# Altium PCB polygon-nognd.PcbDoc
Units mil, origin at the board's own origin, x right, y up, seen from the top; angles counter-clockwise.
Board outline 5872.3 x 3866.25 mil, 2 copper layers (Top Layer, Bottom Layer); 46 components, 102 nets, 353 pads, 252 vias.
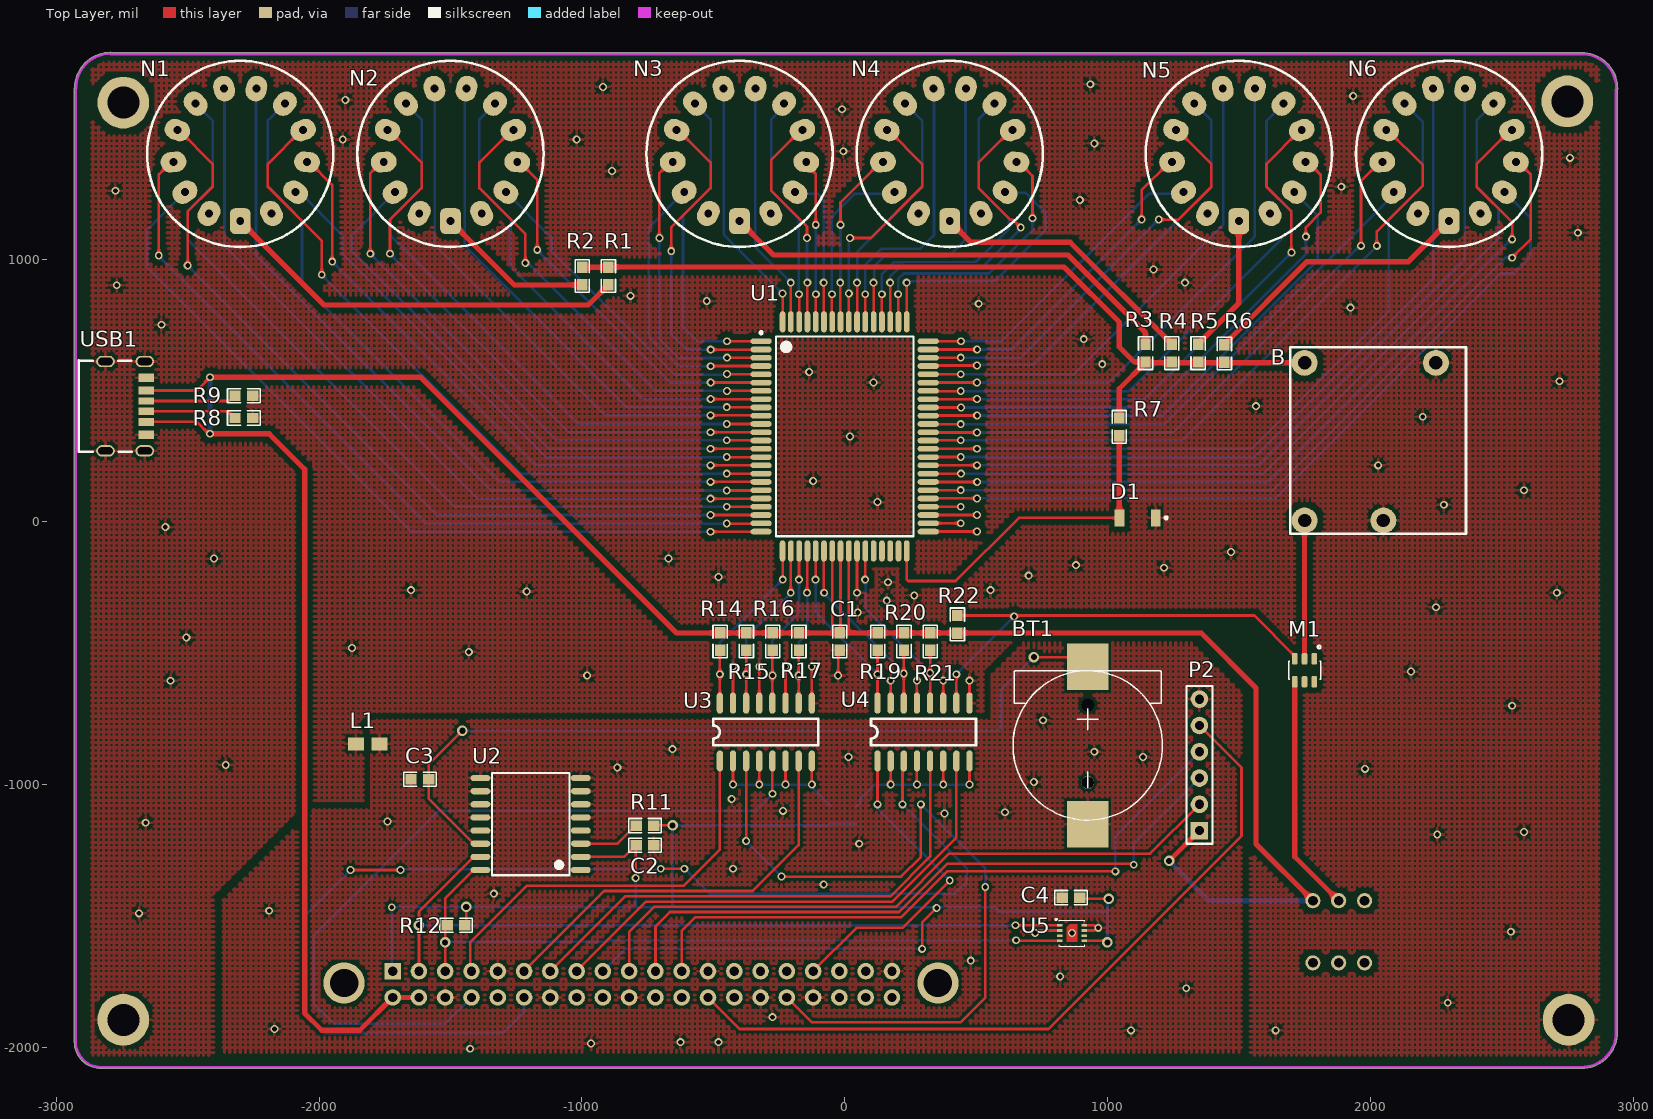
[diagram p0: Top Layer view]
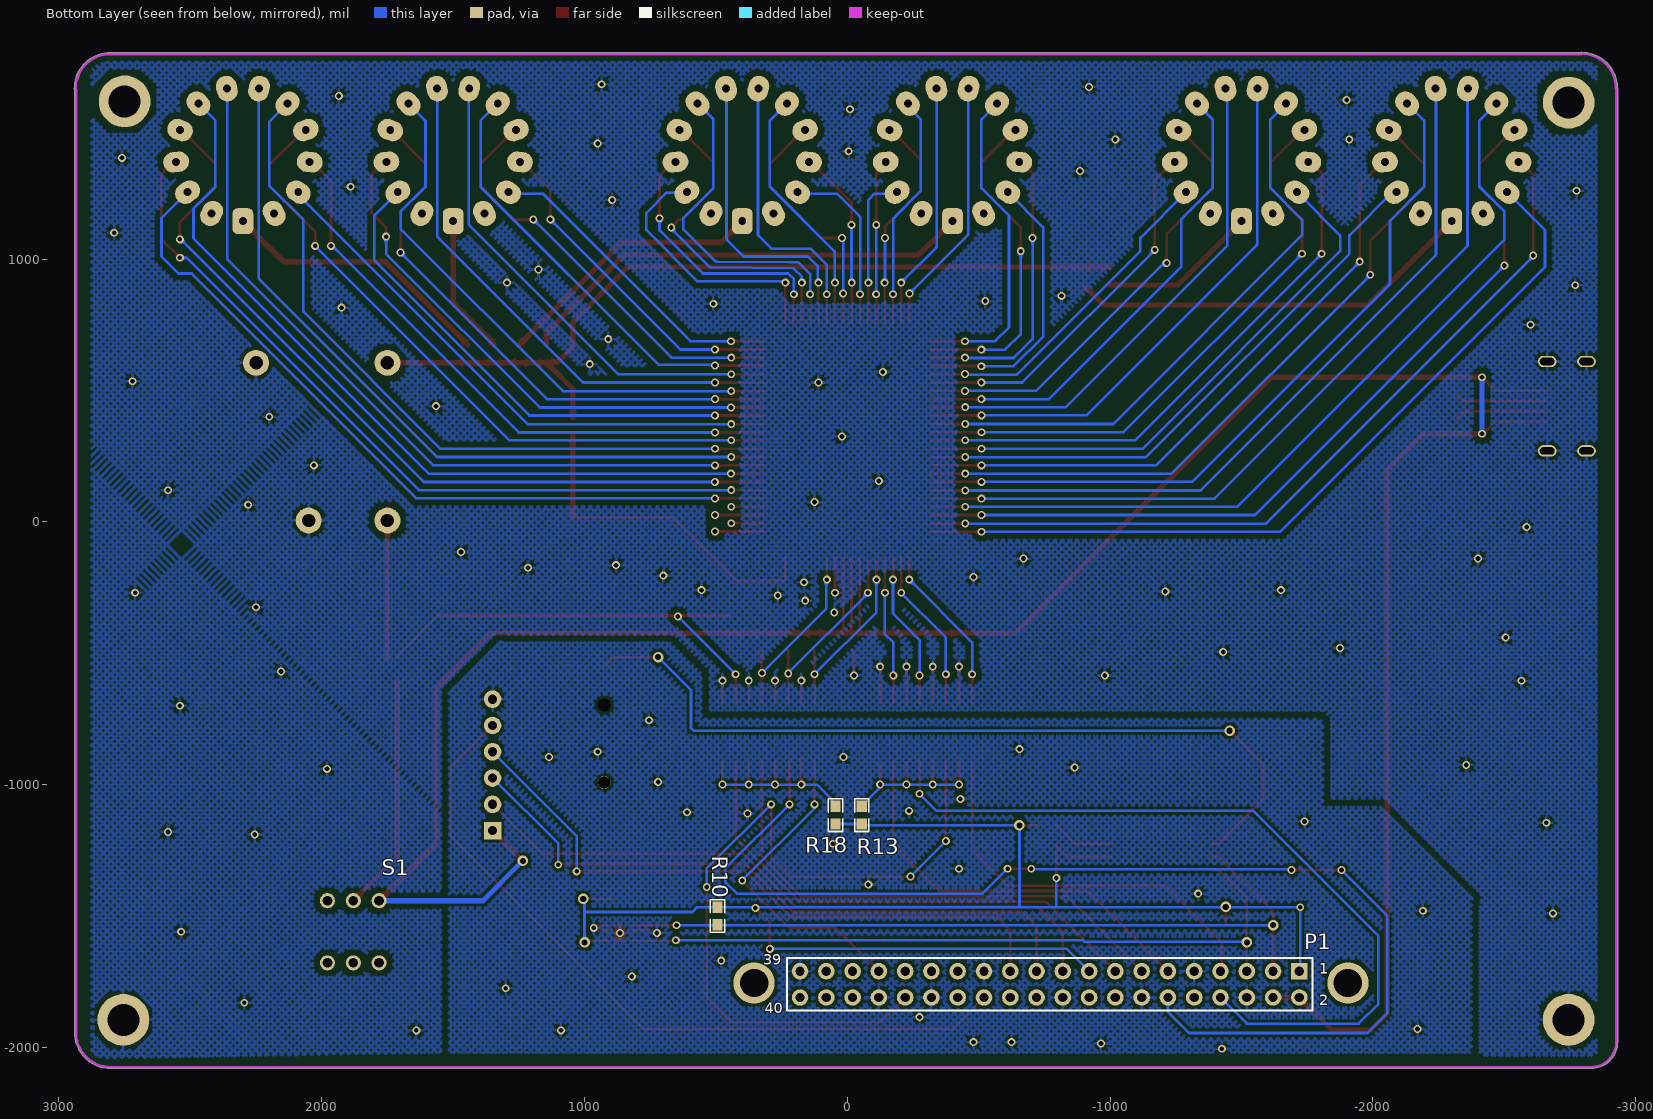
[diagram p1: Bottom Layer view, seen from below]

## Layer stack, top to bottom
Top Solder: solder mask 0.4, Solder Resist, Dk 3.5
Top Layer: signal copper 1.4
Dielectric 1: dielectric 12.6, FR-4, Dk 4.8
Bottom Layer: signal copper 1.4
Bottom Solder: solder mask 0.4, Solder Resist, Dk 3.5

## Board outline
-2931.06,-1980.07 ccw(c-2830.5,-1979.45) -2831.03,-2080.01 ccw(c-2831,-2075) -2831,-2080.01 2800,-2080.01 ccw(c2800,-2075) 2802.52,-2079.34 ccw(c2805.03,-2075) 2805.07,-2080.01 ccw(c2804,-1943.78) 2940.24,-1943.78 ccw(c2804,-1943.78) 2940.1,-1937.76 ccw(c2935.09,-1937.98) 2940.02,-1937.02 2940.02,1645 ccw(c2935,1645) 2939.99,1645.47 ccw(c2936.22,1648.78) 2941.24,1648.78 ccw(c2805,1648.78) 2805,1785.02 ccw(c2805,1780) 2802.5,1784.35 ccw(c2800,1780) 2800,1785.02 -2791.79,1785.02 ccw(c-2795.06,1781.22) -2795.11,1786.23 ccw(c-2793.78,1650) -2930,1652.04 ccw(c-2926.05,1648.95) -2931.06,1648.95 -2931.06,-1980.04 ccw(c-2926.05,-1980.04)

## Design rules (kind name [scope] priority, off if disabled: settings)
Clearance Clearance_2 [All] p1: gap=9.5 ignorepadtopadclearanceinfootprint=FALSE
Clearance Clearance_1 [All] p2: gap=10 ignorepadtopadclearanceinfootprint=FALSE except(0: Arc-Hole Track-Hole SMDPad-Hole THPad-Hole Via-Hole Fill-Hole Poly-Hole Region-Hole Text-Hole)
Clearance [All] p3: gap=10 ignorepadtopadclearanceinfootprint=FALSE except(0: Arc-Hole Track-Hole SMDPad-Hole THPad-Hole Via-Hole Fill-Hole Poly-Hole Region-Hole Text-Hole)
PolygonConnect [All] p1: connectstyle=Relief reliefconductorwidth=10 reliefentries=4 polygonreliefangle="90 Angle" airgapwidth=10
RoutingVias [All] p1: holewidth=28 width=50 viastyle="Through Hole" minholewidth=10 minwidth=20 maxholewidth=28 maxwidth=50
SolderMaskExpansion [All] p1: expansion=4 istentingtop=FALSE
Width [All] p1: maxlimit=20 minlimit=1 preferedwidth=10 minimp=50.000000 maximp=50.000000 favimp=50.000000
30 further rules are at their usual default settings.

## Components (designator, comment, footprint, x,y, rotation, side; value= is the part's Value field where it differs from the comment)
B "NCH8200HV" NCH8200HV 1750,5 r90 top
BT1 "CR1220 holder" BAT1220 925,-850 r180 top
C1 "Cap" C0603 -20,-455 r90 top value=100pF
C2 "Cap Semi" C0603 -760,-1230 r0 top value=104
C3 "Cap Semi" C0603 -1616.54,-979 r0 top value=104
C4 "Cap" C0603 861.54,-1429 r0 top value=100nF
D1 "ZM75" LL-34 1115,15 r180 top
L1 "L0" 0805 -1770,-845 r180 top
M1 "PMOS-AO6401A" SOT95P250X110-6N 1750,-565 r270 top
N1 "ИН-14" IN14 -2300,1400 r0 top
N2 "ИН-14" IN14 -1500,1400 r0 top
N3 "ИН-14" IN14 -400,1400 r0 top
N4 "ИН-14" IN14 400,1400 r0 top
N5 "ИН-14" IN14 1500,1400 r0 top
N6 "ИН-14" IN14 2300,1400 r0 top
P1 "Rasp GPIO" HDR2.54-LI-2x20P -770,-1760 r0 bottom
P2 "Header 6" HDR2.54-LI-6P 1350,-925 r90 top
R1 "Res Semi" R0603 -900,935 r90 top value=20K
R2 "Res Semi" R0603 -1000,935 r90 top value=20K
R3 "Res Semi" R0603 1146,641.54 r270 top value=20K
R4 "Res Semi" R0603 1246,641.54 r270 top value=20K
R5 "Res Semi" R0603 1346,641.54 r270 top value=20K
R6 "Res Semi" R0603 1446,640 r270 top value=20K
R7 "Res Semi" R0603 1044,361.54 r90 top value=240K
R8 "Res Semi" R0603 -2286.54,396 r0 top value=5.1K
R9 "Res Semi" R0603 -2286.54,481 r0 top value=5.1K
R10 "Res Semi" R0603 495,-1500 r90 bottom value=4.7K
R11 "Res Semi" R0603 -760,-1155 r0 top value=10K
R12 "Res Semi" R0603 -1478.46,-1534 r0 top value=4.7K
R13 "Res Semi" R0603 -56,-1116.54 r270 bottom value=150
R14 "Res Semi" R0603 -475,-455 r90 top value=1.9K
R15 "Res Semi" R0603 -375,-455 r90 top value=1.9K
R16 "Res Semi" R0603 -275,-455 r90 top value=1.9K
R17 "Res Semi" R0603 -175,-455 r90 top value=1.9K
R18 "Res Semi" R0603 44,-1116.54 r270 bottom value=150
R19 "Res Semi" R0603 125,-455 r90 top value=1.9K
R20 "Res Semi" R0603 225,-455 r90 top value=1.9K
R21 "Res Semi" R0603 325,-455 r90 top value=1.9K
R22 "Res Semi" R0603 430,-390 r270 top value=1.9K
S1 "XKB8080-Z" SW_PVA2EEH21.7NV2 1880,-1560 r180 bottom
U1 "HV57708" HV57708PG 0,325 r0 top
U2 "DS3231" SOP16_75MM -1195,-1150 r180 top
U3 "TLP290-4" SO16 -300,-800 r90 top
U4 "TLP290-4" SO16 300,-800 r90 top
U5 "SHT31" SHT3x-x-P 865,-1565 r0 top
USB1 "USB3-TypeC-6p" USB-TYPE-C-SMD6 -2735,440 r0 top

## Footprints (in the part's own frame and the unit in brackets; to place one, negate y for a bottom-side part, rotate by r counter-clockwise, add the part's x,y. Pads: shape width x height; smd on the part's side, far side on the other; paste and mask are expansions set on the pad)
0805 [mil] "1/8W"
  rect 60x50 smd: 1(0,0) 2(90,0)
BAT1220 [mm]
  round 1.2 hole 1.2 unplated: 0(0,3.607)
  round 1.2 hole 1.3 unplated: 0(0,-3.886)
  rect 4x4.5 smd: 1(0,-7.595) 2(0,7.645)
  silkscreen extent -7.22,-7.19 7.22,7.24
C0603 [mm] "Chip Resistor; Body 1.6 x 0.8 mm (LxW typ)"
  rect 1.1x1 smd: 1(-0.85,-0.025) 2(0.85,-0.025)
  silkscreen extent -1.57,-0.71 1.57,0.66
HDR2.54-LI-2x20P [mm] "双排排针，20x2脚"
  rect 1.6x1.6 hole 0.9: 1(-24.13,-1.27)
  round 1.6 hole 0.9: 2(-24.13,1.27) 3(-21.59,-1.27) 4(-21.59,1.27) 5(-19.05,-1.27) 6(-19.05,1.27) 7(-16.51,-1.27) 8(-16.51,1.27) 9(-13.97,-1.27) 10(-13.97,1.27) 11(-11.43,-1.27) 12(-11.43,1.27) 13(-8.89,-1.27) 14(-8.89,1.27) 15(-6.35,-1.27) 16(-6.35,1.27) 17(-3.81,-1.27) 18(-3.81,1.27) 19(-1.27,-1.27) 20(-1.27,1.27) 21(1.27,-1.27) 22(1.27,1.27) 23(3.81,-1.27) 24(3.81,1.27) 25(6.35,-1.27) 26(6.35,1.27) 27(8.89,-1.27) 28(8.89,1.27) 29(11.43,-1.27) 30(11.43,1.27) 31(13.97,-1.27) 32(13.97,1.27) 33(16.51,-1.27) 34(16.51,1.27) 35(19.05,-1.27) 36(19.05,1.27) 37(21.59,-1.27) 38(21.59,1.27) 39(24.13,-1.27) 40(24.13,1.27)
  silkscreen extent -25.4,-2.54 25.4,2.54, body extent -25.4,-2.54 25.4,2.54, height 8.5
HDR2.54-LI-6P [mm] "排针，6脚"
  rect 1.7x1.7 hole 0.9: 1(-6.35,0)
  round 1.7 hole 0.9: 2(-3.81,0) 3(-1.27,0) 4(1.27,0) 5(3.81,0) 6(6.35,0)
  silkscreen extent -7.62,-1.27 7.62,1.27, body extent -7.62,-1.27 7.62,1.27, height 2.54
HV57708PG [mm] "QFP, 80-Leads, Body 17.40x23.40mm, Pitch 0.80mm, IPC Medium Density"
  oval 2.05x0.55 smd: 1(-8.075,9.2) 2(-8.075,8.4) 3(-8.075,7.6) 4(-8.075,6.8) 5(-8.075,6) 6(-8.075,5.2) 7(-8.075,4.4) 8(-8.075,3.6) 9(-8.075,2.8) 10(-8.075,2) 11(-8.075,1.2) 12(-8.075,0.4) 13(-8.075,-0.4) 14(-8.075,-1.2) 15(-8.075,-2) 16(-8.075,-2.8) 17(-8.075,-3.6) 18(-8.075,-4.4) 19(-8.075,-5.2) 20(-8.075,-6) 21(-8.075,-6.8) 22(-8.075,-7.6) 23(-8.075,-8.4) 24(-8.075,-9.2) 41(8.075,-9.2) 42(8.075,-8.4) 43(8.075,-7.6) 44(8.075,-6.8) 45(8.075,-6) 46(8.075,-5.2) 47(8.075,-4.4) 48(8.075,-3.6) 49(8.075,-2.8) 50(8.075,-2) 51(8.075,-1.2) 52(8.075,-0.4) 53(8.075,0.4) 54(8.075,1.2) 55(8.075,2) 56(8.075,2.8) 57(8.075,3.6) 58(8.075,4.4) 59(8.075,5.2) 60(8.075,6) 61(8.075,6.8) 62(8.075,7.6) 63(8.075,8.4) 64(8.075,9.2)
  oval 0.55x2.05 smd: 25(-6,-11.075) 26(-5.2,-11.075) 27(-4.4,-11.075) 28(-3.6,-11.075) 29(-2.8,-11.075) 30(-2,-11.075) 31(-1.2,-11.075) 32(-0.4,-11.075) 33(0.4,-11.075) 34(1.2,-11.075) 35(2,-11.075) 36(2.8,-11.075) 37(3.6,-11.075) 38(4.4,-11.075) 39(5.2,-11.075) 40(6,-11.075) 65(6,11.075) 66(5.2,11.075) 67(4.4,11.075) 68(3.6,11.075) 69(2.8,11.075) 70(2,11.075) 71(1.2,11.075) 72(0.4,11.075) 73(-0.4,11.075) 74(-1.2,11.075) 75(-2,11.075) 76(-2.8,11.075) 77(-3.6,11.075) 78(-4.4,11.075) 79(-5.2,11.075) 80(-6,11.075)
  silkscreen extent -8.2,-9.65 6.65,10.15
IN14 [mm]
  rrect50% 2x2.5 hole 0.762: 1(0,-6.5)
  oval 2x2.5 hole 0.762 rot 152.31: 2(-3.021,-5.755)
  oval 2x2.5 hole 0.762 rot 124.62: 3(-5.349,-3.692)
  oval 2x2.5 hole 0.762 rot 96.92: 4(-6.453,-0.784)
  oval 2x2.5 hole 0.762 rot 69.23: 5(-6.078,2.305)
  oval 2x2.5 hole 0.762 rot 41.54: 6(-4.31,4.865)
  oval 2x2.5 hole 0.762 rot 13.85: 7(-1.556,6.311)
  oval 2x2.5 hole 0.762 rot 166.15: 8(1.555,6.311)
  oval 2x2.5 hole 0.762 rot 138.46: 9(4.31,4.866)
  oval 2x2.5 hole 0.762 rot 110.77: 10(6.077,2.305)
  oval 2x2.5 hole 0.762 rot 83.08: 11(6.453,-0.784)
  oval 2x2.5 hole 0.762 rot 55.38: 12(5.349,-3.692)
  oval 2x2.5 hole 0.762 rot 27.69: 13(3.021,-5.755)
  silkscreen extent -9,-9 9,9
LL-34 [mm]
  rect 0.95x1.65 smd: 1(-1.75,0) 2(1.75,0)
  silkscreen extent -2.88,-0.12 -2.63,0.12
NCH8200HV [mm]
  round 2.5 hole 1.3: 1(0,0) 2(0,-7.62) 3(15.24,-12.7) 4(15.24,0)
  silkscreen extent -1.27,-15.6 16.73,1.4
R0603 [mm] "Chip Resistor; Body 1.6 x 0.8 mm (LxW typ)"
  rect 1.1x1 smd: 1(-0.85,-0.025) 2(0.85,-0.025)
  silkscreen extent -1.57,-0.71 1.57,0.66
SHT3x-x-P [mm] "SHT3x with Plastic"
  rrect50% 0.55x0.25 smd mask+0.05: 1(-1.175,0.75)
  rrect20% 0.55x0.25 smd mask+0.05: 2(-1.175,0.25) 3(-1.175,-0.25) 4(-1.175,-0.75) 5(1.175,-0.75) 6(1.175,-0.25) 7(1.175,0.25) 8(1.175,0.75)
  round 0.2 smd mask+0.05: 9(0,0)
  Top Layer region: 0.5,-0.85 -0.5,-0.85 -0.5,0.55 -0.2,0.85 0.5,0.85
  silkscreen extent -1.55,-1.25 1.25,1.35, body extent -1.25,-1.7 1.25,2.65, height 1.25
SO16 [mil] "封装库来自淘宝卖家 ID：黄晶宝石，其他均为盗版"
  oval 80x24 smd: 1(-110,175) 2(-110,125) 3(-110,75) 4(-110,25) 5(-110,-25) 6(-110,-75) 7(-110,-125) 8(-110,-175) 9(110,-175) 10(110,-125) 11(110,-75) 12(110,-25) 13(110,25) 14(110,75) 15(110,125) 16(110,175)
  silkscreen extent -50,-200 50,200, body extent -118,-197 118,197, height 75
SOP16_75MM [mm]
  oval 1.9x0.6 smd: 1(-4.85,4.445) 2(-4.85,3.175) 3(-4.85,1.905) 4(-4.85,0.635) 5(-4.85,-0.635) 6(-4.85,-1.905) 7(-4.85,-3.175) 8(-4.85,-4.445) 9(4.85,-4.445) 10(4.85,-3.175) 11(4.85,-1.905) 12(4.85,-0.635) 13(4.85,0.635) 14(4.85,1.905) 15(4.85,3.175) 16(4.85,4.445)
  silkscreen extent -3.75,-4.95 3.75,4.95
SOT95P250X110-6N [mm]
  rrect50% 1.11x0.55 smd: 1(-1.11,0.95) 2(-1.11,0) 3(-1.11,-0.95) 4(1.11,-0.95) 5(1.11,0) 6(1.11,0.95)
  silkscreen extent -2.39,-1.55 0.85,1.55
SW_PVA2EEH21.7NV2 [mm]
  round 1.458 hole 0.95: 1(2.5,-3) 2(0,-3) 3(-2.5,-3) 4(2.5,3) 5(0,3) 6(-2.5,3)
USB-TYPE-C-SMD6 [mm]
  oval 1.8x1.1 hole 0.7 slot 1.401 at 0 deg: 0(-1.975,-4.32) 0(-1.975,4.32) 0(1.825,-4.32) 0(1.825,4.32)
  rect 1.5x0.8 smd: 1(1.975,2.75) 6(1.975,-2.75)
  rect 1.5x0.76 smd: 2(1.975,1.52) 5(1.975,-1.52)
  rect 1.5x0.7 smd: 3(1.975,0.5) 4(1.975,-0.5)
  silkscreen extent -4.58,-4.41 0.56,4.41

## Part data
BT1: library part BATTERY
C1 C4: "Capacitor", LatestRevisionDate=17-Jul-2002, LatestRevisionNote="Re-released for DXP Platform.", PackageDescription="Radial Cap, Thru-Hole; 2 Leads; 0.3 in Pin Spacing", PackageReference=RAD-0.3, Published=8-Jun-2000, Publisher="Altium Limited"
C2 C3: "Capacitor (Semiconductor SIM Model)", LatestRevisionDate=17-Jul-2002, LatestRevisionNote="Re-released for DXP Platform.", PackageReference=C1206, Published=8-Jun-2000, Publisher="Altium Limited"
D1: library part "Diode 11DQ03", "Schottky Rectifier", Code_JEDEC=DO-204-AL, ComponentLink1Description="Manufacturer Link", ComponentLink1URL=http://www.irf.com/, ComponentLink2Description=Datasheet, ComponentLink2URL=http://www.irf.com/product-info/datasheets/data/11dq03.pdf, DatasheetVersion=Dec-1997, LatestRevisionDate=17-Jul-2002, LatestRevisionNote="Re-released for DXP Platform.", PackageDescription="Diode, Axial; Body 5.2 x 2.7 mm (LxDia. max), Lead Dia. 0.86 mm (max)", PackageReference=DO-204AL, Published=8-Jun-2000, Publisher="Altium Limited"
M1: library part AO6401A
P1: library part "Header 20X2", "Header, 20-Pin, Dual row", LatestRevisionDate=17-Jul-2002, LatestRevisionNote="Re-released for DXP Platform.", Publisher="Altium Limited"
P2: "Header, 6-Pin", LatestRevisionDate=17-Jul-2002, LatestRevisionNote="Re-released for DXP Platform.", Publisher="Altium Limited"
R1 R2 R3 R4 R5 R6 R7 R8 R9 R10 R11 R12 R13 R14 R15 R16 R17 R18 R19 R20 R21 R22: "Semiconductor Resistor", LatestRevisionDate=17-Jul-2002, LatestRevisionNote="Re-released for DXP Platform.", PackageReference=AXIAL-0.5, Published=8-Jun-2000, Publisher="Altium Limited"

## Free pads (board coordinates)
  round 196.85 hole 122.05: 12(-2745,1595) 13(-2745,-1895) 14(2755,-1895) 15(2750,1600)
  round 157.48 hole 108.27: 16(-1905,-1755) 17(355,-1755)

## Via types
v1: diameter 30, hole 18, Top Layer to Bottom Layer, tented both sides, 240 vias
v2: diameter 40, hole 23, Top Layer to Bottom Layer, tented both sides, 9 vias
v3: diameter 30, hole 18, Top Layer to Bottom Layer, 3 vias

## Nets (pads, with @x,y where several pads share a name; then routed paths per layer and width w, separated by ;. In a path a pad name is that pad's centre, name@x,y a point inside that pad or via, vN(x,y) a via of type N, cw(c..) or ccw(c..) an arc to the next point about the centre after c; other vN are vias at no path point)
\I\N\T\/SQW: R11.1 U2.3 | length 239.2
  Top Layer w10: U2.3 -864.43,-1225 -795.43,-1156 R11.1
Boost_switch: M1.3 R22.1 U4.10 | length 1764.4
  Top Layer w10: U4.10 v1(425,-580) ; R22.1@444,-356.54 1558.86,-356.54 1712.6,-510.28 M1.3
  Bottom Layer w10: v1(425,-580) v1(645,-360)
DGND: BT1.2 C2.2 C3.1 C4.1 L1.1 P1.6 P1.9 P1.14 P1.20 P1.25 P1.30 P1.34 P1.39 P2.6 U2.5 U2.6 U2.7 U2.8 U2.9 U2.10 U2.11 U2.12 U2.13 U5.2 U5.7 U5.8 U5.9 | length 208
  Top Layer w10: v1(725,-1565) 730.41,-1565 740.25,-1555.16 U5.2 ; U5.7 949.43,-1555.16 v1@959.59,-1545 ; U5.8 950.06,-1535.47 v1@959.59,-1545 ; v1(965,-1545) v1@959.59,-1545
  other v1: -1425,-2005 -965,-1985 -625,-1980 -480,-1980 1090,-1935 -2170,-1930 -275,-1885 1300,-1775 820,-1730 480,-1670 -2190,-1480 -1335,-1415 -80,-1380 -425,-1320 55,-1225 -1740,-1140 380,-1110 610,-1105 -235,-1100 -430,-1055 720,-990 -865,-935 15,-895 1135,-895 950,-875 -655,-865 755,-755
  other v3: 865,-1565
GND: B.2 B.3 C1.1 D1.1 L1.2 pad.13 pad.14 R8.2 R9.2 U1.34 U3.9 U3.11 U3.13 U3.15 U4.9 U4.11 U4.13 U4.15 USB1.0 USB1.1 USB1.6 | length 1120.5
  Top Layer w10: U3.15 v1(-425,-551.18) v1@-425,-550 ; U3.13 v1@-325,-555 ; U3.11 v1@-225,-560 ; U3.9 v1(-125,-551.18) ; v1(-25,-585) -25,-494.46 C1.1 C1.1@-19,-486.5 ; v1(47,-270) U1.34@47,-136.3 ; U4.15 v1@175,-605 ; U4.13 v1(275,-604.33) ; U4.11 v1(375,-604.33) ; U4.9 v1(475,-604.33)
  other v1: 1640,-1935 2295,-1830 2535,-1560 -2685,-1490 2255,-1190 2585,-1180 -2660,-1145 1980,-940 -2355,-925 2540,-700 -2565,-605 175,-604.33 -980,-585 2155,-570 -325,-551.18 -225,-551.18 -1430,-495 -1875,-480 -2505,-440 50,-345 2250,-325 160,-300 265,-280 2710,-270 -1210,-265 -1650,-260 555,-260 165,-230 -480,-210 700,-205 1215,-175 880,-165 -2400,-140 -670,-140 1470,-115 -2585,-20 2280,65 125,75 2585,120 -120,155 2030,215 20,325 2200,400 1565,440 110,530 2720,535 -135,570 980,600 910,695 -2600,750 1925,815 510,830 -525,840 -815,860 -2770,900 1295,910 1175,960 2790,1100 895,1225 -2775,1260 1890,1275 -885,1335 2760,1385 -5,1410 950,1440 -1910,1455 -1020,1455 -10,1570 -1900,1605 1935,1620 -920,1655 935,1665
HV_CLK: R20.1 U1.30 U4.14 | length 761.8
  Top Layer w10: v1@-80,-268 v1(-78,-270) ; v1@-79,-268 U1.30@-79,-146.3 ; U4.14 v1(225,-577) 225,-489.46 R20.1
  Bottom Layer w10: v1(-78,-270) -80,-272 -78,-272 225,-575 v1(225,-577)
HV_DIN1: R14.1 U1.25 U3.16 | length 744.7
  Top Layer w10: U3.16 v1(-475,-580) -475,-489.46 R14.1 ; U1.25@-236.22,-136.02 -235.61,-136.63 v1@-235.61,-219.39
  Bottom Layer w10: v1(-475,-580) -475,-459.39 v1(-235.61,-220)
HV_DIN2: R15.1 U1.26 U3.14 | length 716.5
  Top Layer w10: U3.14 v1(-375,-580) -375,-489.46 R15.1 ; v1(-205,-270) -205,-136.3 U1.26@-204.72,-136.02
  Bottom Layer w10: v1(-375,-580) -375,-440 v1(-205,-270)
HV_DIN3: R16.1 U1.27 U3.12 | length 691.7
  Top Layer w10: U3.12 v1(-275,-585) -275,-489.46 R16.1 ; v1@-173.61,-224.39 v1(-173.61,-220) U1.27@-173.61,-141.63
  Bottom Layer w10: v1(-275,-585) -275,-450 -173.61,-348.61 v1(-173.61,-220)
HV_DIN4: R17.1 U1.28 U3.10 | length 663.9
  Top Layer w10: U3.10 v1(-175,-585) -175,-489.46 R17.1 ; v1@-143,-275 v1(-143,-270) U1.28@-143,-141.3
  Bottom Layer w10: v1(-175,-585) -175,-460 -143,-428 v1(-143,-270)
HV_LE: R19.1 U1.29 U4.16 | length 742.3
  Top Layer w10: v1@-110.61,-229.39 v1(-110.61,-220) U1.29@-110.61,-146.63 ; U4.16 v1(125,-580) 125,-489.46 R19.1
  Bottom Layer w10: v1(-110.61,-220) -110.61,-344.39 v1(125,-580)
HV_POL: R21.1 U1.35 U4.12 | length 742
  Top Layer w10: v1@78,-224.39 v1(78,-220) U1.35@78,-141.63 ; U4.12 v1(325,-575) 325,-489.46 R21.1
  Bottom Layer w10: v1(78,-220) 80,-222 80,-330 v1(325,-575)
I2C_SCL: P1.5 R12.1 U2.16 U5.4 | length 2798.2
  Top Layer w10: P1.5 v2(-1520,-1600) -1520,-1495 -1520,-1433.46 -1411.54,-1325 U2.16 ; v1(652.5,-1592.5) 654.53,-1594.53 U5.4
  Bottom Layer w10: v2(-1520,-1600) -1517.5,-1597.5 -902.5,-1597.5 -900,-1595 -897.5,-1592.5 v1(652.5,-1592.5)
I2C_SDA: P1.3 R10.1 U2.15 U5.1 | length 2985.9
  Top Layer w10: P1.3 v2(-1620,-1535) -1620,-1483.46 -1411.54,-1275 U2.15 ; v1(650,-1535) 818.27,-1535 U5.1
  Bottom Layer w10: v2(-1620,-1535) v1(650,-1535)
N1_0: N1.12 U1.15 | length 2237.4
  Top Layer w10: N1.12@-2094.99,1260.22 N1.12 ; v1(-448.48,246.2) U1.15@-318.6,246.2
  Bottom Layer w10: N1.12 -2074.63,1254.63 -1910,1090 -1910,1020 -1136.2,246.2 v1(-448.48,246.2)
N1_1: N1.3 U1.24 | length 3097.7
  Top Layer w10: v1(-510.69,-38) U1.24@-319.31,-38
  Bottom Layer w10: N1.3 -2655,1110.23 -2655,970 -1647,-38 v1(-510.69,-38)
N1_2: N1.4 U1.23 | length 3099.9
  Top Layer w10: v1(-2610,1013.12) -2610,1321.77 -2562.62,1369.15 N1.4 ; v1(-448.48,-6.8) U1.23@-318.6,-6.8
  Bottom Layer w10: v1(-2610,1013.12) -2610,1010 -1593.2,-6.8 v1(-448.48,-6.8)
N1_3: N1.5 U1.22 | length 3187.8
  Top Layer w10: N1.5 -2533.56,1490.74 -2405,1362.18 -2405,1275 -2500,1180 v1(-2500,975) ; v1(-510.69,26) U1.22@-319.31,26
  Bottom Layer w10: v1(-2500,975) -1551,26 v1(-510.69,26)
N1_4: N1.6 U1.21 | length 3185.7
  Top Layer w10: v1(-448.48,57.2) U1.21@-318.6,57.2
  Bottom Layer w10: N1.6 -2405,1526.84 -2405,1275 -2500,1180 -2500,1075 -1482.2,57.2 v1(-448.48,57.2)
N1_5: N1.7 U1.20 | length 3037.4
  Top Layer w10: v1(-510.69,88) U1.20@-319.31,88
  Bottom Layer w10: N1.7@-2361.22,1648.44 -2361.02,1648.03 cw(c-2370,1643.63) -2360,1643.63 -2360,1183.73 ccw(c-2350,1183.73) -2360,1183.48 cw(c-2414.35,1182.12) -2360,1180.76 ccw(c-2350,1180.51) -2360,1180.51 -2360,1054.14 ccw(c-2350,1054.14) -2357.07,1047.07 -1398,88 v1(-510.69,88)
N1_6: N1.8 U1.19 | length 2925.7
  Top Layer w10: v1(-448.48,119.2) U1.19@-318.6,119.2
  Bottom Layer w10: N1.8 -2238.96,1648.1 ccw(c-2230,1643.66) -2240,1643.66 -2240,1183.77 cw(c-2250,1183.73) -2240,1183.48 ccw(c-2185.65,1182.12) -2240,1180.76 cw(c-2250,1180.51) -2240,1180.47 -2240,1019.14 ccw(c-2230,1019.14) -2237.07,1012.07 -1344.2,119.2 v1(-448.48,119.2)
N1_7: N1.9 U1.18 | length 2824.8
  Top Layer w10: v1(-510.69,152) U1.18@-319.31,152
  Bottom Layer w10: N1.9 -2195,1526.87 -2195,1275 -2065,1145 -2065,905 -1312,152 v1(-510.69,152)
N1_8: N1.10 U1.17 | length 2679.5
  Top Layer w10: N1.10 -2066.44,1490.76 -2195,1362.2 -2195,1275 -1990,1070 v1(-1990,940) ; v1(-448.48,183.2) U1.17@-318.6,183.2
  Bottom Layer w10: v1(-1990,940) -1233.2,183.2 v1(-448.48,183.2)
N1_9: N1.11 U1.16 | length 2375.6
  Top Layer w10: N1.11 -2037.38,1369.15 -1950,1281.77 v1(-1950,990) ; v1(-510.69,215) U1.16@-319.31,215
  Bottom Layer w10: v1(-1950,990) -1175,215 v1(-510.69,215)
N2_0: N2.12 U1.5 | length 1289.5
  Top Layer w10: v1(-447.8,562.2) U1.5@-317.91,562.2
  Bottom Layer w10: N2.12 -1115,1080.23 -1115,1030 -645,560 -450,560 v1(-447.8,562.2)
N2_1: N2.3 U1.14 | length 2159.9
  Top Layer w10: v1(-510.69,278) U1.14@-319.31,278
  Bottom Layer w10: N2.3 -1875,1090.23 -1875,1030 -1123,278 v1(-510.69,278)
N2_2: N2.4 U1.13 | length 2163.4
  Top Layer w10: v1(-1805,1020) -1805,1326.77 -1775.85,1355.92 -1775.85,1369.15 N2.4 ; v1(-448.48,310.2) U1.13@-318.6,310.2
  Bottom Layer w10: v1(-1805,1020) -1095.2,310.2 v1(-448.48,310.2)
N2_3: N2.5 U1.12 | length 2264.3
  Top Layer w10: N2.5 -1733.56,1490.74 -1610,1367.18 -1610,1270 -1730,1150 v1@-1730,1025 ; v1(-510.69,341) U1.12@-319.31,341
  Bottom Layer w10: v1(-1730,1020) -1051,341 v1(-510.69,341)
N2_4: N2.6 U1.11 | length 2285.4
  Top Layer w10: v1(-448.48,372.2) U1.11@-318.6,372.2
  Bottom Layer w10: N2.6 -1669.7,1590.7 -1610,1531 -1610,1270 -1730.86,1149.14 -1730.86,1090.86 -1012.2,372.2 v1(-448.48,372.2)
N2_5: N2.7 U1.10 | length 2103.2
  Top Layer w10: v1(-510.69,405) U1.10@-319.31,405
  Bottom Layer w10: N2.7@-1561.22,1648.44 -1561.02,1648.03 cw(c-1570,1643.63) -1560,1643.63 -1560,1183.73 ccw(c-1550,1183.73) -1560,1183.48 cw(c-1614.35,1182.12) -1560,1180.76 ccw(c-1550,1180.51) -1560,1180.51 -1560,1059.14 ccw(c-1550,1059.14) -1557.07,1052.07 -910,405 v1(-510.69,405)
N2_6: N2.8 U1.9 | length 1981.7
  Top Layer w10: v1(-448.48,436.2) U1.9@-318.6,436.2
  Bottom Layer w10: N2.8 -1445,1642.24 -1445,1050 -831.2,436.2 v1(-448.48,436.2)
N2_7: N2.9 U1.8 | length 1855.7
  Top Layer w10: v1(-510,467) U1.8@-318.62,467
  Bottom Layer w10: N2.9 -1390,1531.87 -1390,1270 -1270,1150 -1270,970 -767,467 v1(-510,467)
N2_8: N2.10 U1.7 | length 1733.9
  Top Layer w10: N2.10 -1266.44,1490.76 -1390,1367.2 -1390,1270 -1215,1095 v1(-1215,985) ; v1(-447.8,498.2) U1.7
  Bottom Layer w10: v1(-1215,985) -1205,985 -718.2,498.2 v1(-447.8,498.2)
N2_9: N2.11 U1.6 | length 1431.2
  Top Layer w10: N2.11 -1237.38,1369.15 -1170,1301.77 v1(-1170,1035) ; v1(-510,530) U1.6@-318.62,530
  Bottom Layer w10: v1(-1170,1035) -665,530 v1(-510,530)
N3_0: N3.12 U1.75 | length 586.2
  Top Layer w10: v1(-80,910) -80,762.28 U1.75
  Bottom Layer w10: N3.12 -183.8,1249.04 -104.04,1249.04 -80,1225 v1(-80,910)
N3_1: N3.3 U1.4 | length 1080
  Top Layer w10: v1(-510,592) -509.28,592.72 U1.4
  Bottom Layer w10: N3.3 -745,1120.23 -745,704.04 -632.96,592 v1(-510,592)
N3_2: N3.4 U1.3 | length 1118.4
  Top Layer w10: v1(-705,1080) -705,1326.77 -662.62,1369.15 N3.4 ; v1(-447.8,624.8) -447.5,624.51 -319.22,624.51 U1.3@-317.91,623.2
  Bottom Layer w10: v1(-705,1080) -705,695 -633.2,623.2 -449.39,623.2 v1(-447.8,624.8)
N3_3: N3.5 U1.2 | length 1262
  Top Layer w10: v1(-660,1030) -660,1120 -510,1270 -510,1367.18 -633.56,1490.74 N3.5 ; v1(-510,655) -318.62,655 U1.2
  Bottom Layer w10: v1(-660,1030) -660,715 -600,655 v1(-510,655)
N3_4: N3.6 U1.1 | length 1238.7
  Top Layer w10: v1(-447.8,687.2) U1.1
  Bottom Layer w10: N3.6 -510,1531.84 -510,1270 -615,1165 -615,740 -562.2,687.2 v1(-447.8,687.2)
N3_5: N3.7 U1.80 | length 979.9
  Top Layer w10: U1.80 v1(-236.22,868.78)
  Bottom Layer w10: N3.7@-461.22,1648.44 -461.02,1648.03 cw(c-470,1643.63) -460,1643.63 -460,1183.73 ccw(c-450,1183.73) -460,1183.48 cw(c-514.35,1182.12) -460,1180.76 ccw(c-450,1180.51) -460,1180.51 -460,1096.7 ccw(c-450,1096.7) -457.07,1089.63 v1(-236.22,868.78)
N3_6: N3.8 U1.79 | length 943.4
  Top Layer w10: v1(-205,910) -204.86,909.86 -204.86,761.16 U1.79
  Bottom Layer w10: N3.8 -338.96,1648.1 ccw(c-330,1643.66) -340,1643.66 -340,1183.77 cw(c-350,1183.73) -340,1183.48 ccw(c-285.65,1182.12) -340,1180.76 cw(c-350,1180.51) -340,1180.47 -340,1049.42 ccw(c-330,1049.42) -337.07,1042.35 -204.86,910.14 v1(-205,910)
N3_7: N3.9 U1.78 | length 898.1
  Top Layer w10: U1.78@-173.5,758.15 v1(-173.5,865.91)
  Bottom Layer w10: N3.9 -230.31,1579.69 -280,1530 -280,1260 -175,1155 -175,867.41 v1(-173.5,865.91)
N3_8: N3.10 U1.77 | length 844.4
  Top Layer w10: N3.10 -166.44,1490.76 -280,1377.2 -280,1260 -143.5,1123.5 v1(-143.5,1080) ; U1.77@-142,758.15 v1(-142,910) v1@-142,911.85
  Bottom Layer w10: v1(-143.5,1080) -143.5,911.5 v1(-142,910)
N3_9: N3.11 U1.76 | length 626.3
  Top Layer w10: N3.11 -145.96,1359.13 -110,1323.17 v1(-110,1130) ; v1(-109.8,865.91) -110.02,865.69 -110.02,758.67 U1.76@-109.5,758.15
  Bottom Layer w10: v1(-110,1130) -110,866.11 v1(-109.8,865.91)
N4_0: N4.12 U1.65 | length 1016.7
  Top Layer w10: U1.65@236,758.15 236.11,758.26 236.11,910.89 v1@236,911
  Bottom Layer w10: v1@236,911 239.83,914.83 251.68,914.83 251.86,915 570,915 765,1110 765,1175 687.22,1252.78 612.45,1252.78 N4.12
  other v1: 236,910
N4_1: N4.3 U1.74 | length 679.8
  Top Layer w10: U1.74@-48.5,758.15 v1(-48.5,865.91)
  Bottom Layer w10: v1(-48.5,865.91) -48.5,1161.5 39.04,1249.04 183.8,1249.04 N4.3
N4_2: N4.4 U1.73 | length 683.5
  Top Layer w10: U1.73@-17,758.15 v1@-17,911.85 ; v1@-16,1139 -16,1215.77 137.38,1369.15 N4.4
  Bottom Layer w10: v1@-17,911.85 -16,912.85 v1@-16,1139
  other v1: -17,910 -16,1130
N4_3: N4.5 U1.72 | length 951.2
  Top Layer w10: U1.72@15.78,761.02 v1(15.78,868.78) ; v1(20,1080) 100,1080 295,1275 295,1362.18 166.44,1490.74 N4.5
  Bottom Layer w10: v1(15.78,868.78) 15.78,1070.37 20,1074.59 v1(20,1080)
N4_4: N4.6 U1.71 | length 959.9
  Top Layer w10: U1.71@47.28,761.02 v1@47.28,914.72
  Bottom Layer w10: v1@47.28,914.72 47.28,1027.28 295,1275 295,1526.84 N4.6
  other v1: 47.28,910
N4_5: N4.7 U1.70 | length 1086.3
  Top Layer w10: U1.70@78.5,758.15 v1(78.5,865.91)
  Bottom Layer w10: v1(78.5,865.91) 78.5,978.5 139.37,1039.37 289.37,1039.37 337.07,1087.07 ccw(c330,1094.14) 340,1094.19 340,1180.51 cw(c350,1180.51) 340,1180.76 ccw(c285.65,1182.12) 340,1183.48 cw(c350,1183.73) 340,1183.73 340,1643.63 ccw(c330,1643.63) 338.98,1648.03 N4.7@338.78,1648.44
N4_6: N4.8 U1.69 | length 1178.6
  Top Layer w10: U1.69@110,758.15 v1@110,911.85
  Bottom Layer w10: v1@110,911.85 112.81,914.66 112.81,972.81 149.55,1009.55 394.55,1009.55 457.07,1072.07 ccw(c450,1079.14) 460,1079.14 460,1180.47 ccw(c450,1180.51) 460,1180.76 cw(c514.35,1182.12) 460,1183.48 ccw(c450,1183.73) 460,1183.77 460,1643.66 cw(c470,1643.66) 461.04,1648.1 N4.8
  other v1: 110,910
N4_7: N4.9 U1.68 | length 1286.8
  Top Layer w10: U1.68@141.5,758.15 v1(141.5,865.91)
  Bottom Layer w10: v1(141.5,865.91) 141.5,942.12 187.51,988.12 220.29,988.12 495.96,990.04 ccw(c495.9,1000.04) 502.9,992.9 ; 502.93,992.93 625,1115 625,1155 510,1270 510,1531.87 N4.9
N4_8: N4.10 U1.67 | length 1247.4
  Top Layer w10: v1(173,910) 173.11,909.89 173.11,761.14 U1.67 ; N4.10 633.56,1490.76 510,1367.2 510,1270 630,1150 640,1150 v1(670,1120)
  Bottom Layer w10: v1(173,910) 173,933 204.58,964.58 518.97,968 ccw(c518.86,978) 525.93,970.93 670,1115 v1(670,1120)
N4_9: N4.11 U1.66 | length 1043.5
  Top Layer w10: U1.66@203.5,758.15 v1(203.5,865.91) ; N4.11 662.62,1369.15 715,1316.77 v1(715,1155)
  Bottom Layer w10: v1(203.5,865.91) 203.5,923.5 225,945 550,945 715,1110 v1(715,1155)
N5_0: N5.12 U1.55 | length 2023.2
  Top Layer w10: U1.55@317.91,404.71 v1(504.29,404.71)
  Bottom Layer w10: v1(504.29,404.71) 1209.71,404.71 1800,995 1800,1165.23 N5.12
N5_1: N5.3 U1.64 | length 1206.5
  Top Layer w10: U1.64 v1(442.8,687.2)
  Bottom Layer w10: v1(442.8,687.2) 597.2,687.2 1159.04,1249.04 1283.8,1249.04 N5.3
N5_2: N5.4 U1.63 | length 1299
  Top Layer w10: U1.63 v1(504.29,655.71) ; v1(1130,1150) 1130,1261.77 1237.38,1369.15 N5.4
  Bottom Layer w10: v1(504.29,655.71) 635.71,655.71 v1(1130,1150) v1@1120,1150
N5_3: N5.5 U1.62 | length 1622.8
  Top Layer w10: U1.62@316.81,623.5 317.82,624.51 441.4,624.51 v1(441.69,624.8) ; v1(1195,1150) 1270,1150 1395,1275 1395,1362.18 1266.44,1490.74 N5.5
  Bottom Layer w10: v1(441.69,624.8) 441.89,625 670,625 v1(1195,1150)
N5_4: N5.6 U1.61 | length 1704.4
  Top Layer w10: U1.61@316.81,592 319.76,594.95 357.91,594.95 357.96,595 502.99,595 v1(503.19,595.2)
  Bottom Layer w10: v1(503.19,595.2) 504.99,597 717,597 1395,1275 1395,1526.84 N5.6
N5_5: N5.7 U1.60 | length 1876.9
  Top Layer w10: U1.60@316.81,561.5 v1(441.69,561.5)
  Bottom Layer w10: v1(441.69,561.5) 871.5,561.5 1437.07,1127.07 ccw(c1430,1134.14) 1440,1134.19 1440,1180.51 cw(c1450,1180.51) 1440,1180.76 ccw(c1385.65,1182.12) 1440,1183.48 cw(c1450,1183.73) 1440,1183.73 1440,1643.63 ccw(c1430,1643.63) 1438.98,1648.03 N5.7@1438.78,1648.44
N5_6: N5.8 U1.59 | length 2036.3
  Top Layer w10: U1.59@316.81,530 v1(503.19,530)
  Bottom Layer w10: v1(503.19,530) 1005,530 1557.07,1082.07 ccw(c1550,1089.14) 1560,1089.14 1560,1180.47 ccw(c1550,1180.51) 1560,1180.76 cw(c1614.35,1182.12) 1560,1183.48 ccw(c1550,1183.73) 1560,1183.77 1560,1643.66 cw(c1570,1643.66) 1561.04,1648.1 N5.8
N5_7: N5.9 U1.58 | length 2181.7
  Top Layer w10: U1.58@316.81,497.5 v1(441.69,497.5)
  Bottom Layer w10: v1(441.69,497.5) 1082.5,497.5 1700,1115 1700,1180 1605,1275 1605,1526.03 1669.69,1590.72 N5.9
N5_8: N5.10 U1.57 | length 2178.4
  Top Layer w10: U1.57@316.81,467 v1(503.19,467) ; v1(1700,1025) 1700,1180 1605,1275 1605,1362.2 1733.56,1490.76 N5.10
  Bottom Layer w10: v1(503.19,467) 1142,467 v1(1700,1025)
N5_9: N5.11 U1.56 | length 2080.4
  Top Layer w10: U1.56 v1(442.8,435.2) ; N5.11 1762.62,1369.15 1811.11,1320.66 1811.11,1176.11 1755,1120 v1(1755,1085)
  Bottom Layer w10: v1(442.8,435.2) 1170.2,435.2 1755,1020 v1(1755,1085)
N6_0: N6.12 U1.45 | length 2960.5
  Top Layer w10: U1.45@316.81,89 v1(503.19,89)
  Bottom Layer w10: v1(503.19,89) 1639,89 2495,945 2545,945 2610,1010 2610,1155.23 N6.12
N6_1: N6.3 U1.54 | length 2144.4
  Top Layer w10: U1.54@316.81,371.5 v1(441.69,371.5)
  Bottom Layer w10: v1(441.69,371.5) 1216.5,371.5 2089.4,1244.4 N6.3
N6_2: N6.4 U1.53 | length 2299.2
  Top Layer w10: U1.53 318.66,340 v1(503.19,340) ; v1(1965,1050) 1965,1296.77 2037.38,1369.15 N6.4
  Bottom Layer w10: v1(503.19,340) 1250,340 1960,1050 v1(1965,1050)
N6_3: N6.5 U1.52 | length 2589.6
  Top Layer w10: U1.52@316.81,310.5 317.58,309.73 441.22,309.73 v1(441.69,310.2) ; v1(2025,1050) 2025,1105 2200,1280 2200,1357.18 2066.44,1490.74 N6.5
  Bottom Layer w10: v1(441.69,310.2) 441.89,310 1285,310 v1(2025,1050)
N6_4: N6.6 U1.51 | length 2843.7
  Top Layer w10: U1.51@316.81,278 v1(503.19,278)
  Bottom Layer w10: v1(503.19,278) 1548,278 2070,800 2070,1150 2200,1280 2200,1521.84 N6.6
N6_5: N6.7 U1.50 | length 2927.5
  Top Layer w10: U1.50@316.81,246.5 v1(441.69,246.5)
  Bottom Layer w10: v1(441.69,246.5) 1561.5,246.5 2237.07,922.07 ccw(c2230,929.14) 2240,929.19 2240,1180.51 cw(c2250,1180.51) 2240,1180.76 ccw(c2185.65,1182.12) 2240,1183.48 cw(c2250,1183.73) 2240,1183.73 2240,1643.63 ccw(c2230,1643.63) 2238.98,1648.03 N6.7@2238.78,1648.44
N6_6: N6.8 U1.49 | length 3016.6
  Top Layer w10: U1.49@316.81,215 v1(503.19,215)
  Bottom Layer w10: v1(503.19,215) 1575,215 2357.07,997.07 ccw(c2350,1004.14) 2360,1004.14 2360,1180.47 ccw(c2350,1180.51) 2360,1180.76 cw(c2414.35,1182.12) 2360,1183.48 ccw(c2350,1183.73) 2360,1183.77 2360,1643.66 cw(c2370,1643.66) 2361.04,1648.1 N6.8
N6_7: N6.9 U1.48 | length 3115.5
  Top Layer w10: U1.48@317.91,183.2 v1(442.8,183.2)
  Bottom Layer w10: v1(442.8,183.2) 1593.2,183.2 2488,1078 2488,1192 2405,1275 2405,1526.87 N6.9
N6_8: N6.10 U1.47 | length 3135.2
  Top Layer w10: U1.47@317.91,151.71 v1(504.29,151.71) ; N6.10 2533.56,1490.76 2405,1362.2 2405,1275 2540,1140 v1(2540,1075)
  Bottom Layer w10: v1(504.29,151.71) 1611.71,151.71 2535,1075 v1(2540,1075)
N6_9: N6.11 U1.46 | length 3041.5
  Top Layer w10: U1.46@316.81,120.5 v1(441.69,120.5) ; v1(2540,1005) 2611.11,1076.11 2611.11,1320.66 2562.62,1369.15 N6.11 N6.11@2575,1348.19
  Bottom Layer w10: v1(441.69,120.5) 1630.5,120.5 2515,1005 v1(2540,1005)
NetB_1: B.1 M1.2 | length 526.3
  Top Layer w20: M1.2 B.1
NetBT1_1: BT1.1 C3.2 U2.14 | length 3175.5
  Top Layer w10: v2(-1455,-795) -1583.07,-923.07 C3.2 -1583.07,-1053.46 -1411.54,-1225 U2.14 ; v2(720,-515) 889,-515 BT1.1
  Bottom Layer w10: v2(-1455,-795) 585,-795 595,-785 595,-640 v2(720,-515)
NetD1_2: D1.2 R7.1 U1.40 | length 1309.5
  Top Layer w10: U1.40@236.22,-136.02 236.22,-219.14 242.08,-225 422.58,-225 662.58,15 D1.2@1041.1,15 ; D1.2@1045,18.9 D1.2@1041.1,15 ; D1.2 D1.2@1041.1,15
  Top Layer w20: D1.2@1045,18.9 R7.1
NetM1_4: M1.4 S1.5 | length 902.5
  Top Layer w20: M1.4 1712.6,-1274.49 S1.5
NetN1_1: N1.1 R1.1 | length 1567.1
  Top Layer w10: N1.1 -2300,1142.2 -2266.75,1108.95 N1.1@-2264.85,1108.95 ; R1.1@-915.65,884.88 -913.69,884.88 -899,899.57 R1.1
  Top Layer w20: N1.1@-2264.85,1108.95 -1980.91,825 -975.54,825 R1.1@-915.65,884.88
NetN2_1: N2.1 R2.1 | length 604.2
  Top Layer w20: N2.1 -1500,1139.49 -1471.37,1110.86 -1466.77,1110.86 -1257.44,901.54 R2.1
NetN3_1: N3.1 R3.1 | length 1768.4
  Top Layer w20: N3.1 -400,1139.49 -371.37,1110.86 -366.77,1110.86 -270.91,1015 850,1015 1145,720 R3.1
NetN4_1: N4.1 R4.1 | length 1043.2
  Top Layer w20: N4.1 400,1139.49 428.63,1110.86 433.23,1110.86 480.61,1063.48 858.48,1063.48 1245,676.97 R4.1
NetN5_1: N5.1 R5.1 | length 533.3
  Top Layer w20: R5.1 1345,676.97 1500,831.97 N5.1
NetN6_1: N6.1 R6.1 | length 1053.8
  Top Layer w20: R6.1 1445,675.43 1759.57,990 2145.91,990 2266.77,1110.86 2271.37,1110.86 2300,1139.49 N6.1
NetR8_1: R8.1 USB1.4 | length 347.7
  Top Layer w10: USB1.4 -2347.27,420.3 -2321.97,395 R8.1
NetR9_1: R9.1 USB1.3 | length 345.6
  Top Layer w10: USB1.3 -2342.27,459.7 -2321.97,480 R9.1
NetR13_1: R13.1 U3.2 U3.4 U3.6 U3.8 | length 747.1
  Top Layer w10: v1@-425,-995 U3.2 ; v1@-325,-995 U3.4 ; v1(-225,-1000) U3.6@-225,-915 ; v1(-125,-1000) U3.8@-125,-920
  Bottom Layer w10: v1(-425,-1000) v1(-325,-1000) v1(-225,-1000) v1(-125,-1000) -121.17,-1003.83 -121.17,-1014.93 -55,-1081.1 R13.1
NetR18_1: R18.1 U4.2 U4.4 U4.6 U4.8 | length 812.1
  Top Layer w10: 175,-985 U4.2@175,-900 ; v1@275,-995 U4.4 ; v1@375,-995 U4.6 ; v1@475,-995 U4.8
  Bottom Layer w10: R18.1 59.69,-1068.39 59.69,-1055.31 115,-1000 v1(175,-1000) v1(275,-1000) v1(375,-1000) v1(475,-1000)
RP_Boost: P1.15 U4.7 | length 1947.4
  Top Layer w10: P1.15 -755.5,-1445.5 181.5,-1445.5 425,-1202 U4.7
RP_CLK: P1.12 U4.3 | length 4540.3
  Top Layer w10: v1(-1880,-1325) v1(-1690,-1325) ; v1(-700,-1320) v1(-610,-1320) ; v1(220,-1075) 220,-915 U4.3
  Bottom Layer w10: v1(-1880,-1325) -2055,-1500 -2055,-1870 -1980,-1945 -1300,-1945 -1220,-1865 P1.12 ; v1(-1690,-1325) -1687.5,-1322.5 -702.5,-1322.5 v1(-700,-1320) ; v1(-610,-1320) -515,-1415 420,-1415 465,-1370 465,-1320 v1(220,-1075)
RP_DIN1: P1.7 U3.1 | length 1545
  Top Layer w10: P1.7 -1425,-1705 -1425,-1600 -1210,-1385 -613.46,-1385 -475,-1246.54 U3.1
RP_DIN2: P1.32 U3.3 | length 2927.2
  Top Layer w10: v1(-375,-1215) U3.3 ; v1(-240,-1350) 215,-1350 290,-1275 v1(290,-1075) ; P1.32 -125,-1905 440,-1905 535,-1810 v1(535,-1390)
  Bottom Layer w10: v1(-375,-1215) v1(-240,-1350) ; v1(290,-1075) 535,-1320 v1(535,-1390)
RP_DIN3: P1.8 U3.5 | length 3026.4
  Top Layer w10: v1(-275,-1035) U3.5
  Bottom Layer w10: P1.8 -1520,-1910 -1945,-1910 -2020.86,-1834.14 -2020.86,-1575.86 -1547.95,-1102.95 cw(c-1540.86,-1110) -1540.86,-1100 -340,-1100 v1(-275,-1035)
RP_DIN4: P1.11 U3.7 | length 1563.8
  Top Layer w10: P1.11 -915,-1405 -350,-1405 -175,-1230 U3.7
RP_LE: P1.33 U4.1 | length 1231.8
  Top Layer w10: P1.33 45,-1545 220,-1545 v1(400,-1365) ; v1@125,-1082.5 U4.1
  Bottom Layer w10: v1@125,-1082.5 125,-1090 v1(400,-1365)
  other v1: 125,-1075
RP_POL: P1.13 U4.5 | length 1989.8
  Top Layer w10: P1.13 -835,-1425 174.42,-1425 325,-1274.42 U4.5
SPI_CE1: P1.26 P2.5 | length 2870.4
  Top Layer w10: P1.26 -400,-1930 775,-1930 1510,-1195 1510,-935 P2.5
SPI_MISO: P1.21 P2.3 | length 2524.6
  Top Layer w10: P1.21 -720,-1540 -665,-1485 207,-1485 391.5,-1300.5 1095.5,-1300.5 v1(1100,-1305)
  Bottom Layer w10: v1(1100,-1305) 1100,-1225 P2.3
SPI_MOSI: P1.19 P2.2 | length 2520.9
  Top Layer w10: P1.19 -820,-1560 -725,-1465 195,-1465 397,-1263 1162,-1263 P2.2
SPI_SCLK: P1.23 P2.4 | length 2484.6
  Top Layer w10: P1.23 -620,-1557 -567.5,-1504.5 215.5,-1504.5 390,-1330 v1(1030,-1330)
  Bottom Layer w10: v1(1030,-1330) 1030,-1195 P2.4
V3.3: C2.1 C4.2 P1.1 P1.17 R10.2 R11.2 R12.2 R13.2 R18.2 U2.2 U5.5 | length 6401.4
  Top Layer w10: P1.1@-1725,-1705 P1.1 ; R12.2 -1440,-1530 v2(-1440,-1465) ; U2.2 -839.43,-1275 -795.43,-1231 v1(-795.43,-1355.5) ; R11.2 -725.54,-1155 v2(-655,-1155) ; v1(295,-1625) 295,-1525 v1(350,-1470) ; C4.2 900,-1435 v2(1005,-1435) ; U5.5 994.53,-1594.53 v2(1000,-1600)
  Bottom Layer w10: P1.1 -1723.46,-1706.54 v1(-1723.46,-1466.54) -1440,-1466.54 -795,-1466.54 ; P1.17 -835,-1625 v1(295,-1625) ; v1(-795.43,-1355.5) -795,-1355.93 -795,-1466.54 ; R18.2 R13.2 -60,-1155 v2(-655,-1155) -655,-1466.54 ; v2(1000,-1600) 1000,-1485 ; v2(1005,-1435) 1000,-1440 1000,-1485 ; -795,-1466.54 -655,-1466.54 ; -655,-1466.54 350,-1466.54 R10.2 571.54,-1466.54 590,-1485 1000,-1485
V5: C1.2 P1.2 P1.4 P2.1 R14.2 R15.2 R16.2 R17.2 R19.2 R20.2 R21.2 R22.2 S1.4 U1.31 U1.32 U1.33 USB1.2 USB1.5 | length 10733.1
  Top Layer w10: USB1.5 -2465.15,380.15 v3@-2420,335 ; USB1.2 -2465.15,499.85 v3(-2415,550) ; -1615,550 -1614.14,550.86 ; -55,-423.46 -47.61,-416.07 U1.31@-47.61,-141.63 ; C1.2 C1.2@-17,-419.54 ; C1.2@-16,-419.54 U1.32@-16,-141.3 ; 15,-423.46 15,-220.39 15.39,-220 ; 15.39,-219.39 U1.33@15.39,-136.63
  Top Layer w20: v3@-2420,335 v3(-2415,335) -2190,335 -2055,200 -2055,-1870 -1990,-1935 -1845,-1935 P1.2 P1.4 ; v3(-2415,550) -1615,550 ; -1614.14,550.86 -639.82,-423.46 -55,-423.46 15,-423.46 R22.2 1356.75,-423.46 1565.58,-632.3 1565.58,-1225.9 S1.4 ; v2(1235,-1290) P2.1
  Bottom Layer w20: v3(-2415,335) v3(-2415,550) ; v2(1235,-1290) 1386.89,-1441.89 S1.4
V170: B.4 R1.2 R2.2 R3.2 R4.2 R5.2 R6.2 R7.2 | length 3211
  Top Layer w10: R3.2 R3.2@1150,608.07
  Top Layer w20: R2.2 R1.2 -897.46,970 835,970 1045,760 1045,665 1101.93,608.07 R3.2 1145,606.1 1045,506.1 R7.2 ; R3.2@1150,608.07 1153.07,605 1245,605 1345,605 1445,605 B.4
pads on no net: BT1.0 M1.1 M1.5 M1.6 N1.2 N1.13 N2.2 N2.13 N3.2 N3.13 N4.2 N4.13 N5.2 N5.13 N6.2 N6.13 P1.10 P1.16 P1.18 P1.22 P1.24 P1.27 P1.28 P1.29 P1.31 P1.35 P1.36 P1.37 P1.38 P1.40 S1.1 S1.2 S1.3 S1.6 U1.36 U1.37 U1.38 U1.39 U1.41 U1.42 U1.43 U1.44 U2.1 U2.4 U5.3 U5.6
copper on no net: | length 622.5
  Top Layer w10: 316.81,-37 v1(503.19,-37) ; 316.81,-5.5 v1(441.69,-5.5) ; 316.81,26 v1(503.19,26) ; 316.81,57.5 v1(441.69,57.5)

## Polygon pours and split planes (outlines as drawn)
DGND on Top Layer "DGND_L01_P009" (hatched 90Degree grid 20 track 12, remove dead copper, pour order 9): 1510,-2020 1510,-650 1320,-460 675,-460 675,-465 560,-580 560,-755 -1795,-755 -1815,-775 -1800,-790 -1800,-1095 -2020,-1095 -2370,-1445 -2365,-1450 -2365,-2020
GND on Top Layer "GND_L01_P018" (hatched 90Degree grid 20 track 12, remove dead copper, pour order 18): -2400,-1425 -2405,-1420 -2050,-1065 -1830,-1065 -1825,-1060 -1830,-1055 -1830,-740 -1815,-725 530,-725 530,-565 655,-440 1290,-440 1300,-430 1340,-430 1340,-435 1540,-635 1540,-2030 2870,-2030 2870,1755 -2865,1755 -2865,-2030 -2400,-2030
no net on Top Layer "NONET_L01_P004" (solid, pour order 4): 635,545
no net on Top Layer "NONET_L01_P002" (solid, pour order 2): 1270,965
no net on Top Layer "NONET_L01_P001" (solid, pour order 1): 2180,835
DGND on Bottom Layer "DGND_L02_P010" (hatched 45Degree grid 20 track 12, remove dead copper, pour order 10): 1515,-2020 1515,-650 1320,-455 1315,-460 675,-460 555,-580 555,-750 -1795,-750 -1810,-765 -1810,-1085 -2030,-1085 -2380,-1435 -2375,-1440 -2375,-2020
GND on Bottom Layer "GND_L02_P014" (hatched 45Degree grid 20 track 12, remove dead copper, pour order 14): -2390,-2070 -2390,-1435 -2035,-1080 -2035,-1075 -1815,-1075 -1810,-1070 -1810,-745 535,-745 545,-735 545,-575 550,-575 685,-440 1330,-440 1530,-640 1530,-2018.48 2875,-2040.61 2875,1761.81 -2850,1748.2 -2850,-2030 -2358.2,-2030
GND on Bottom Layer "GND_L02_P015" (hatched 45Degree grid 20 track 8, pour order 15): 1335,-40
DGND on Bottom Layer "DGND_L02_P012" (hatched Horizontal grid 20 track 8, pour order 12): 1350,1925
DGND on Bottom Layer "DGND_L02_P011" (hatched Horizontal grid 20 track 8, pour order 11): 1360,1925

## Keep-outs
Keep-Out Layer:
  lines w10: -2926.05,1648.95 -2926.05,-1980.04 ccw(c-2830.5,-1979.45) -2831,-2075 2800,-2075 ; -2925,1650 cw(c-2793.78,1650) -2795.06,1781.22 ; -2793.85,1780 2800,1780 ; 2805,1780 cw(c2805,1648.78) 2936.22,1648.78 ; 2805.03,-2075 ccw(c2804,-1943.78) 2935.09,-1937.98 ; 2935,-1940.64 2935,1645

## Other copper
Bottom Layer:
  pour cut-out: 2535,-90

## Text inside footprints (layer, text, board x,y; h text height)
P1: Bottom Overlay "39" at 320,-1685 h40; Bottom Overlay "40" at 315,-1870 h40; Bottom Overlay "2" at -1795,-1840 h40; Bottom Overlay "1" at -1795,-1720 h40